# Altium PCB POWER_2layer.PcbDoc (part 2 of 2)
Units mm, origin at the board's own origin, x right, y up, seen from the top; angles counter-clockwise.
Board outline 130 x 60 mm, 2 copper layers (Top Layer, Bottom Layer), stack 1.571 mm thick; 93 components, 51 nets, 347 pads, 515 vias.
Unrouted connection lines stored in the file: 102.
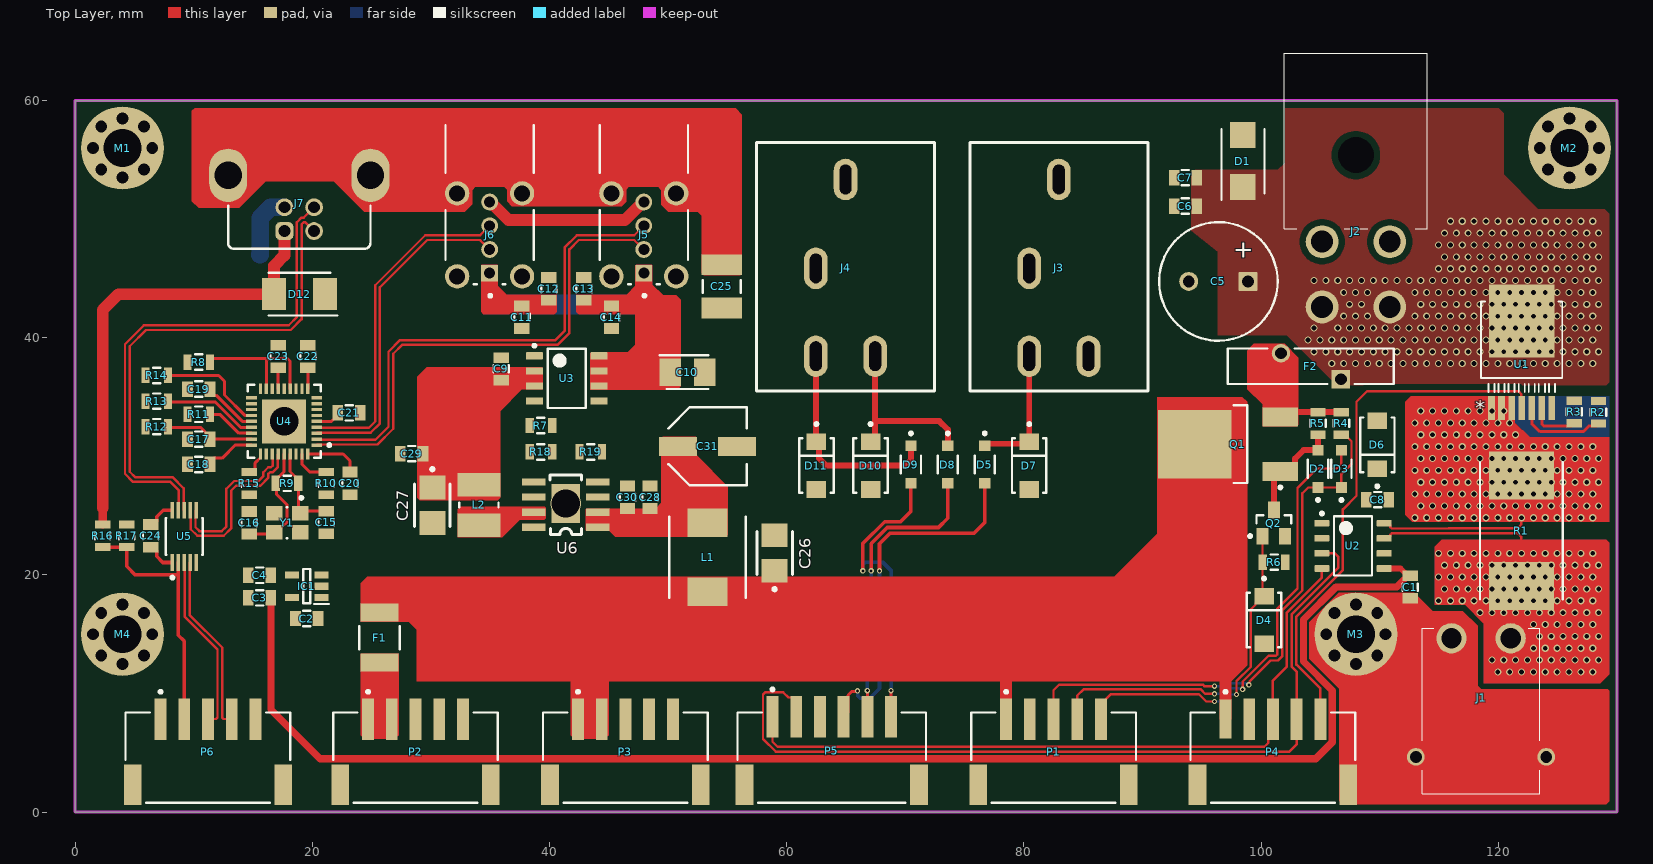
[diagram p0: Top Layer view]

## Via types
v1: diameter 0.6, hole 0.4, Top Layer to Bottom Layer, tented both sides, 503 vias
v2: diameter 0.45, hole 0.25, Top Layer to Bottom Layer, 12 vias

## Nets (pads, with @x,y where several pads share a name; then routed paths per layer and width w, separated by ;. In a path a pad name is that pad's centre, name@x,y a point inside that pad or via, vN(x,y) a via of type N, cw(c..) or ccw(c..) an arc to the next point about the centre after c; other vN are vias at no path point) (continued)
pads on no net: IC1.4 J2.5 J3.3 J3.5 J4.3 J5.5 J5.6 J6.5 J6.6 P2.5 P3.5 U4.6 U4.7 U4.8 U4.9 U4.11 U4.14 U4.16 U4.18 U4.19 U4.20 U4.21 U4.34

## Polygon pours and split planes (outlines as drawn)
+13.8V_IN on Top Layer "+13.8V_IN_L01_P000" (solid, pour order 0): 102.175,40.2 106.375,36 129.1,36 130,36.9 130,49.825 128.975,50.85 123.375,50.85 120.45,53.775 120.45,58.95 119.4,60 102.6,60 102.025,59.425 102.025,54.75 101.425,54.15 94.45,54.15 94.125,53.825 94.125,49.04 96.35,47.247 96.35,40.2 99.2,40.2
GND on Bottom Layer "GND_L02_P002" (solid, pour order 2): 0,0 0,60 130,60 130,0
+13.8V_IN on Bottom Layer "+13.8V_IN_L02_P001" (solid, pour order 1): 103.025,39.375 106.65,35.75 129.046,35.75 130,36.704 130,49.35 128.95,50.4 115.362,50.413 114.4,49.45 114.4,45.25 103.025,45.25

## Keep-outs
Keep-Out Layer:
  the board outline again, w0.254

## Other copper
Top Layer:
  region net NetC28_1: 43.15,25.6 48.95,25.6 49.425,26.075 49.425,31.525 49.55,31.65 52.35,31.65 52.4,31.6 52.4,30.075 55.025,27.45 55.025,23.4 54.85,23.225 45.55,23.225 45.05,23.725 43.1,23.725 43.075,23.75 43.075,25.525
  region net USB_VBUS: 43.45,35.625 50.775,35.625 51.075,35.925 51.075,43.2 50.7,43.575 49.575,43.575 48.675,44.475 48.675,46.1 48.625,46.15 47.3,46.15 47.25,46.1 47.25,41.975 47.25,39.425 46.6,38.775 43.525,38.775 43.45,38.7
  region net USB_VBUS: 48.675,42.175 48.475,41.975 42.45,41.975 42.25,42.175 42.25,43.625 46.5,43.625 47.25,44.375 47.25,46.1 47.3,46.15 48.625,46.15 48.675,46.1
  region net USB_VBUS: 34.225,42.175 34.425,41.975 40.4,41.975 40.6,42.175 40.6,43.625 36.4,43.625 35.65,44.375 35.65,46.1 35.6,46.15 34.275,46.15 34.225,46.1
  region net SHIELD: 9.85,51.525 10.425,50.95 13.825,50.95 16.075,53.2 21.8,53.2 24.375,50.625 32.85,50.625 33.475,51.25 33.475,52.45 33.75,52.725 36.175,52.725 36.425,52.475 36.425,51.5 36.825,51.1 46.1,51.1 46.475,51.475 46.475,52.5 46.7,52.725 49.15,52.725 49.425,52.45 49.425,51.2 50,50.625 52.5,50.625 52.825,50.3 52.825,45.475 53.025,45.275 56.075,45.275 56.225,45.425 56.225,58.825 55.7,59.35 10.075,59.35 9.85,59.125
  region net NetL2_1: 32.25,25.525 32.475,25.75 39.6,25.75 39.675,25.675 39.675,24.775 39.575,24.675 37.475,24.675 36,23.2 32.25,23.2
  region net +5V: 28.85,26.525 29.075,26.3 35.625,26.3 35.825,26.5 35.825,33.8 37.675,35.65 39.375,35.65 39.45,35.725 39.45,37.425 39.375,37.5 29.65,37.5 28.85,36.7
  region net PA_CUR_P: 121.4,35.075 121.4,32.842 122.638,31.604 129.375,31.604 129.375,24.475 112.75,24.475 112.15,25.075 112.15,34.6 112.625,35.075
  region net GND: 104.075,16.025 106.55,18.5 112.925,18.5 114.475,16.95 117,16.95 118.25,15.7 118.25,10.675 118.575,10.35 129.225,10.35 129.35,10.225 129.35,0.9 129.1,0.65 106.85,0.65 106.6,0.9 106.6,10.4 104.075,12.925
  region net NetF2_2: 100.125,32.525 100.125,34.375 98.825,35.675 98.825,38.925 99.375,39.475 102,39.475 103.15,38.325 103.15,32.675 103,32.525
  region net +13.8: 91.25,35 98.425,35 98.825,34.6 98.825,12.375 97.5,11.05 31.4,11.05 28.825,11.05 28.825,15.375 28.125,16.075 24.075,16.075 24.075,19.3 24.625,19.85 87.625,19.85 91.25,23.475
  region net +13.8: 41.775,17.05 41.775,6.5 42.075,6.2 44.675,6.2 44.975,6.5 44.975,17.05
  region net NetF1_2: 24.075,13.375 24.075,6.5 24.375,6.2 26.975,6.2 27.275,6.5 27.275,13.375
  region net PA_CUR_N: 118.775,10.875 128.6,10.875 129.35,11.625 129.35,22.725 129.1,22.975 115.25,22.975 114.65,22.375 114.65,17.475 117.2,17.475 118.775,15.9
Bottom Layer:
  pour cut-out: 9.05,60.025 9.05,48.15 9.7,47.5 24.925,47.5 24.9,50.6 32.875,50.6 33.775,51.575 33.775,52.725 36.182,52.725 36.182,51.225 36.8,50.6 45.775,50.6 46.475,51.3 46.475,52.5 46.725,52.725 49.125,52.725 49.375,52.5 49.375,50.6 48.225,50.6 47.975,50.3 47.975,46.478 43.5,46.478 43.504,43.904 39.4,43.9 39.4,46.541 36.182,46.517 31.051,46.478 30.675,46.134 30.675,42.45 31.66,41.465 55.54,41.465 56.4,42.325 56.4,60
  region net USB_VBUS: 34.225,42.175 34.425,41.975 48.5,41.975 48.65,42.125 48.65,46.125 48.625,46.15 47.325,46.15 47.25,46.075 47.25,44.325 46.55,43.625 36.4,43.625 35.65,44.375 35.65,46.1 35.6,46.15 34.275,46.15 34.225,46.1
  region net PA_CUR_P: 121.4,35.075 129.375,35.08 129.375,24.475 112.75,24.475 112.15,25.075 112.15,34.625 112.6,35.075
  region net PA_CUR_N: 118.775,10.875 128.6,10.875 129.35,11.625 129.35,22.725 129.1,22.975 115.25,22.975 114.65,22.375 114.65,17.475 117.2,17.475 118.775,15.9

## Dimensions
34.95,49.445 to 18.95,64 on Mechanical 1
34.95,49.445 to 47.95,49.445 on Mechanical 1
47.95,49.445 to 64.96,53.35 on Mechanical 1
82.95,53.35 to 107.964,63.887 on Mechanical 1
82.95,53.35 to 64.96,53.35 on Mechanical 1
130,60 to 89.95,61 on Mechanical 1
130,60 to 108,55.4 on Mechanical 1
130,0 to 108,15 on Mechanical 1
130,0 to 108,15 on Mechanical 1
130,60 to 126,56 on Mechanical 1
130,60 to 126,56 on Mechanical 1
0,60 to 4,56 on Mechanical 1
0,60 to 4,56 on Mechanical 1
0,0 to 4,15 on Mechanical 1
0,0 to 4,15 on Mechanical 1
0,60 to 44.225,64 on Mechanical 1
0,60 to 31.225,64 on Mechanical 1
0,60 to 13.8,64 on Mechanical 1
130,60 to 114.025,64 on Mechanical 1
0,60 to 0,0 on Mechanical 1
0,60 to 130,60 on Mechanical 1

## Text inside footprints (layer, text, board x,y; h text height)
C5: Top Overlay "+" at 99.4,48 h1.5 r180
U1: Top Overlay "*" at 118.048,33.437 h1.27; Mechanical 13 "*" at 119.108,36.345 h1.27